# Altium PCB Servo_PCB.PcbDoc
Units mil, origin at the board's own origin, x right, y up, seen from the top; angles counter-clockwise.
Board outline 1510 x 1900 mil, 2 copper layers (Top Layer, Bottom Layer); 23 components, 15 nets, 97 pads, 47 vias.
Unrouted connection lines stored in the file: 55.
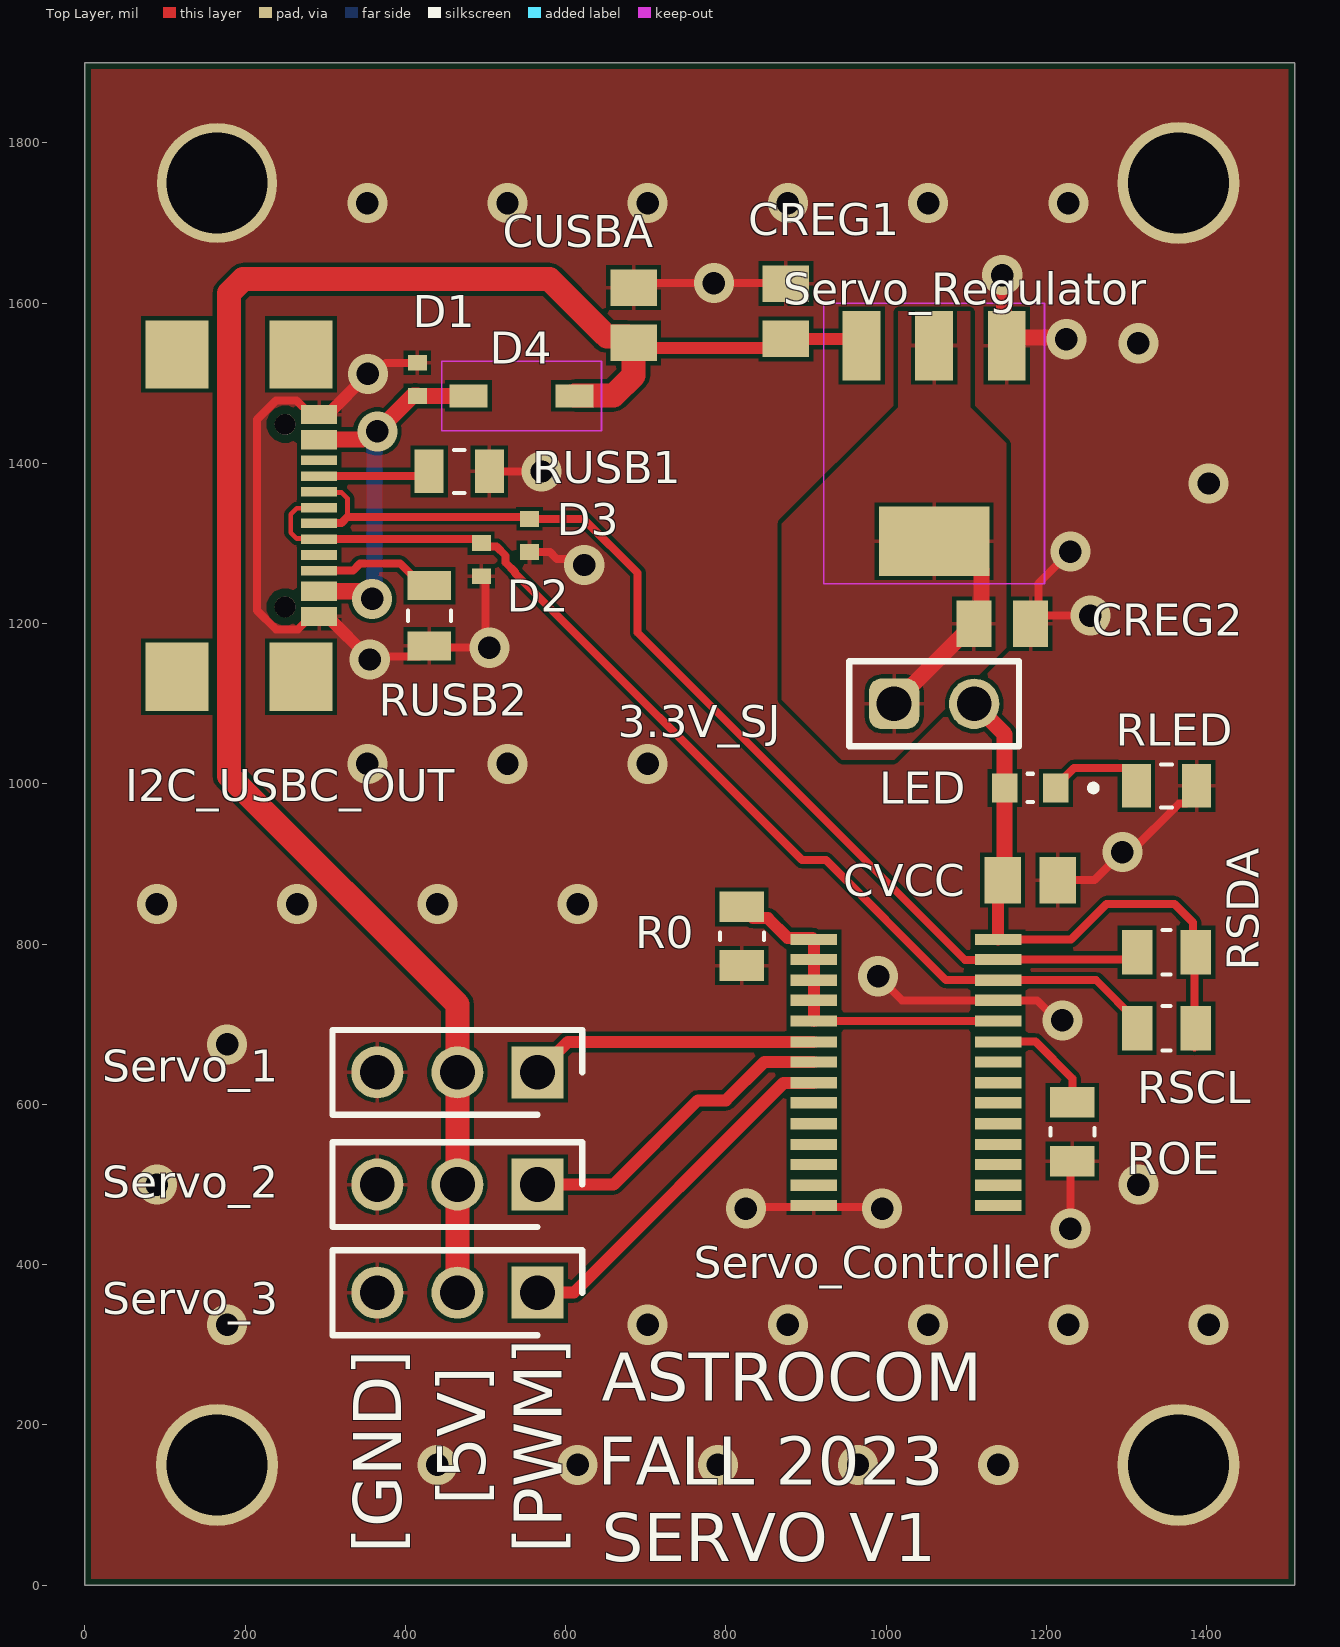
[diagram p0: Top Layer view]
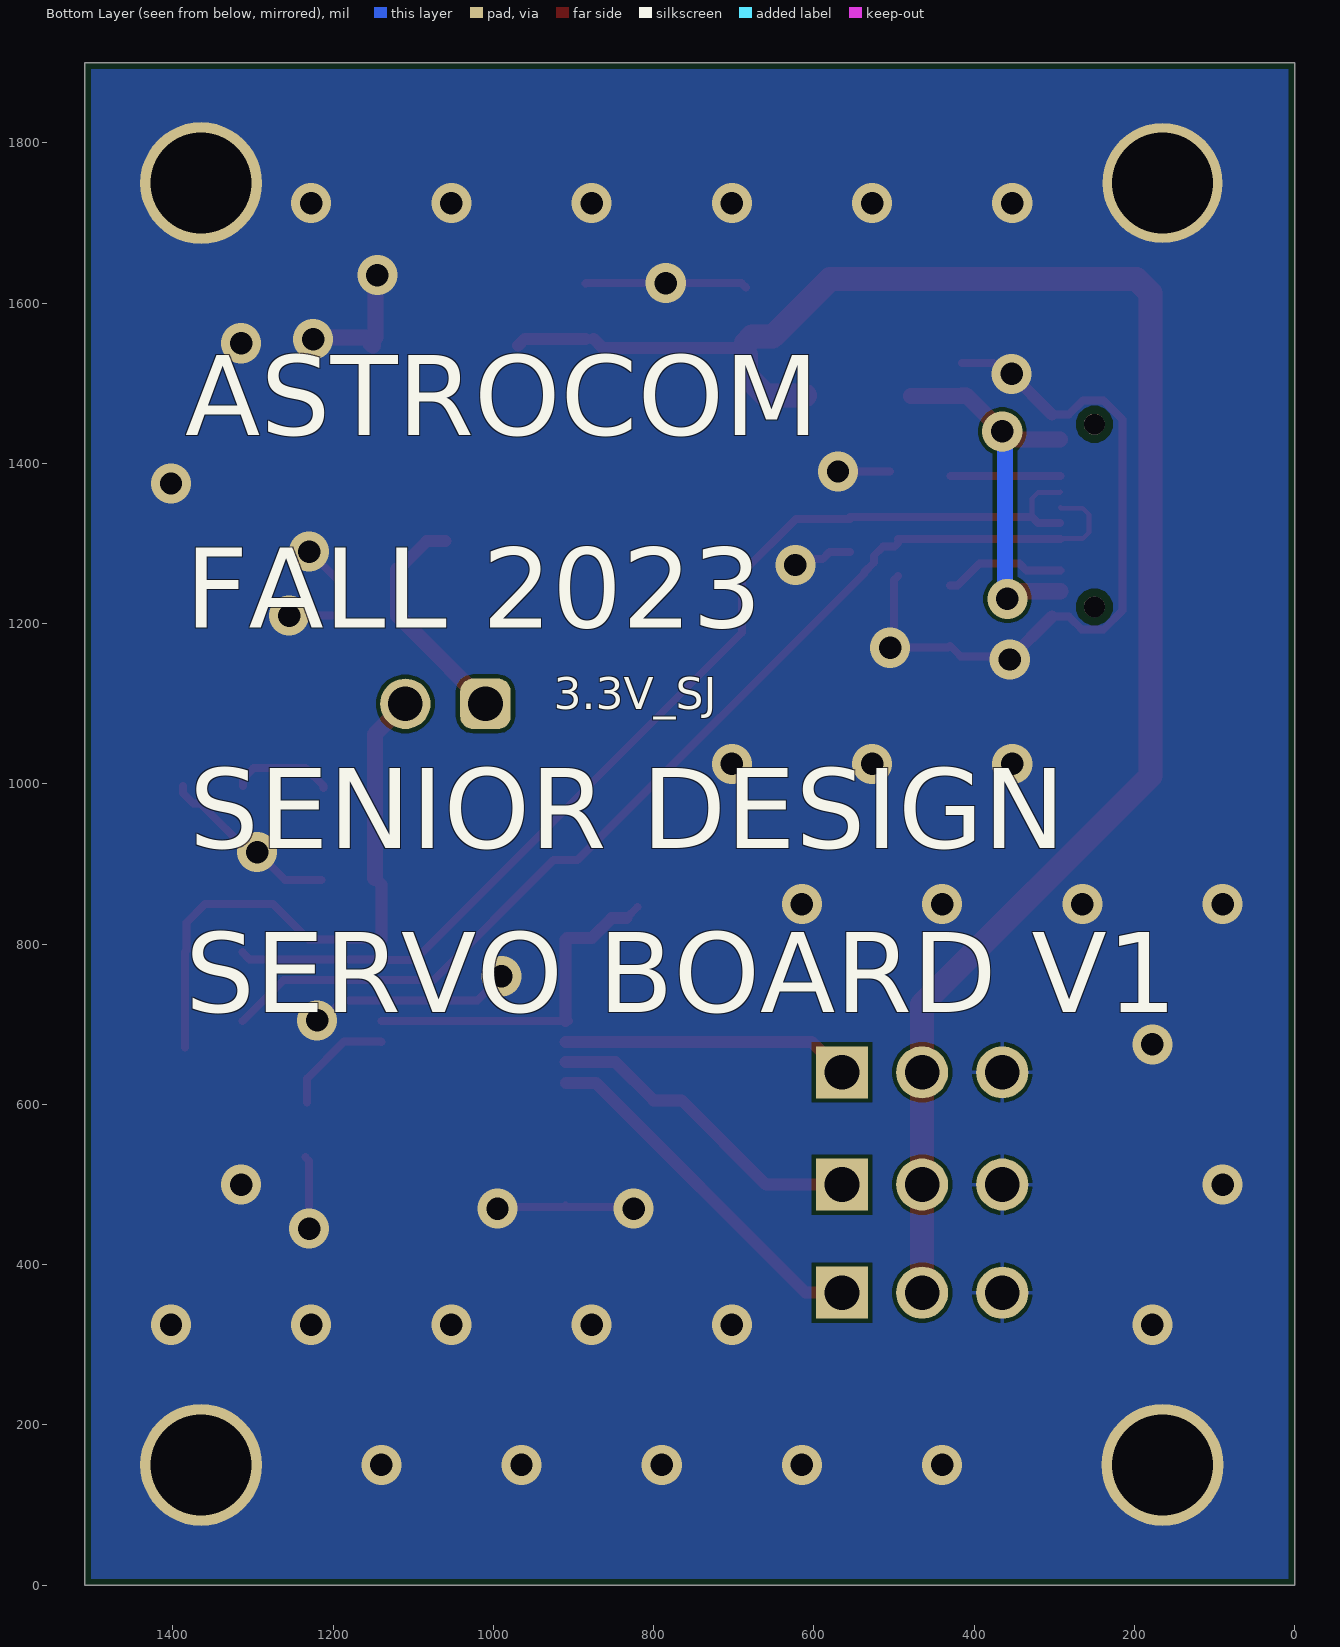
[diagram p1: Bottom Layer view, seen from below]
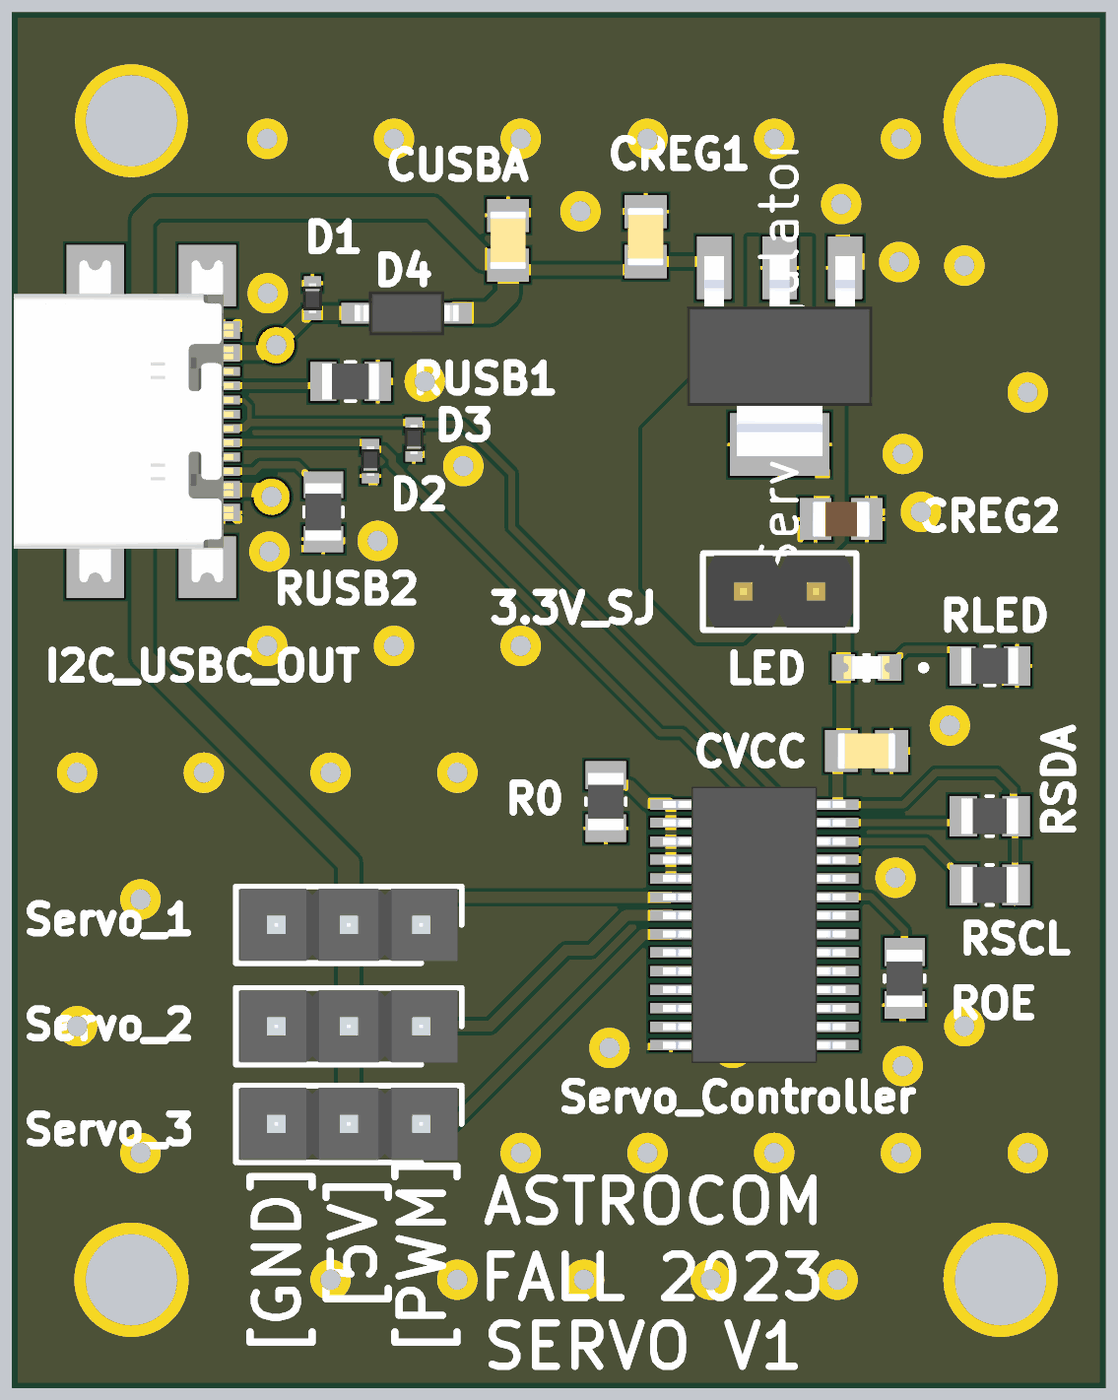
[diagram p2: 3D render of the assembled board from above, using the file's embedded part models]

## Layer stack, top to bottom
Top Solder: solder mask 0.4, Solder Resist, Dk 3.5
Top Layer: signal copper 1.4
Dielectric 1: dielectric 12.6, FR-4, Dk 4.8
Bottom Layer: signal copper 1.4
Bottom Solder: solder mask 0.4, Solder Resist, Dk 3.5

## Board outline
0,0 0,1900 1510,1900 1510,0

## Design rules (kind name [scope] priority, off if disabled: settings)
BoardOutlineClearance [All] p1: gap=7.87 ignorepadtopadclearanceinfootprint=FALSE
Clearance [All] p1: gap=5 ignorepadtopadclearanceinfootprint=FALSE except(9.84: Arc-Hole Track-Hole SMDPad-Hole THPad-Hole Via-Hole Fill-Hole Poly-Hole Region-Hole Text-Hole)
ComponentClearance [All] p1: gap=5 collisioncheckmode=3 verticalgap=5 showdistances=TRUE
DiffPairsRouting [All] p1: maxlimit=10 minlimit=5 mostfreqgap=5 toplayer_minwidth=5 toplayer_maxwidth=1000 toplayer_prefwidth=5 bottomlayer_minwidth=5 bottomlayer_maxwidth=1000 bottomlayer_prefwidth=5 maxuncoupledlength=500
Height [All] p1: minheight=0 maxheight=71497.94 prefheight=500
HoleSize [All] p1: absolutevalues=TRUE maxlimit=248.03 minlimit=11.81 maxpercent=80.000 minpercent=20.000
HoleToHoleClearance [All] p1: gap=9.84 allowstackedmicrovias=FALSE
MinimumAnnularRing [All] p1: minimumring=3
MinimumSolderMaskSliver [All] p1: minsoldermaskwidth=0
PlaneClearance [All] p1: clearance=5
PlaneConnect PlaneConnectPowerPads [InPadClass('PowerPads')] p1: planeconnectstyle=Direct reliefexpansion=20 reliefentries=4 reliefconductorwidth=10 reliefairgap=10
PlaneConnect [All] p2: pad.planeconnectstyle=Relief pad.reliefexpansion=11.81 pad.reliefentries=4 pad.reliefconductorwidth=5 pad.reliefairgap=5 via.planeconnectstyle=Direct via.reliefexpansion=11.81 via.reliefentries=4 via.reliefconductorwidth=5 via.reliefairgap=5
PolygonConnect PolygonConnectPowerPads [All vs (InPadClass('PowerPads'))] p1: connectstyle=Direct reliefconductorwidth=10 reliefentries=4 polygonreliefangle="90 Angle" airgapwidth=10
PolygonConnect [All] p2: thpad.connectstyle=Relief thpad.reliefconductorwidth=5 thpad.reliefentries=4 thpad.polygonreliefangle="90 Angle" thpad.airgapwidth=5 smdpad.connectstyle=Relief smdpad.reliefconductorwidth=5 smdpad.reliefentries=4 smdpad.polygonreliefangle="90 Angle" smdpad.airgapwidth=5 via.connectstyle=Direct via.reliefconductorwidth=5 via.reliefentries=4 via.polygonreliefangle="90 Angle" via.airgapwidth=5
RoutingVias [All] p1: holewidth=11.81 width=23.62 viastyle="Through Hole" minholewidth=11.81 minwidth=23.62 maxholewidth=23.62 maxwidth=259.84
SilkToSilkClearance [All] p1: silktosilkclearance=0
SilkToSolderMaskClearance [IsPad] p1: minsilkscreentomaskgap=5 clearancetoexposedcopper=TRUE
SolderMaskExpansion [All] p1: expansion=2.95 istentingtop=FALSE
Width [All] p1: maxlimit=1000 minlimit=5 preferedwidth=5 minimp=50.000000 maximp=50.000000 favimp=50.000000
20 further rules are at their usual default settings.

## Components (designator, comment, footprint, x,y, rotation, side; value= is the part's Value field where it differs from the comment)
3.3V_SJ "61300211121" 61300211121 1060,1100 r0 top
CREG1 "10uF" CAPC2012X88N 875,1590 r90 top
CREG2 "22uF" CAPC2012X145N 1145,1200 r180 top
CUSBA "10uF" CAPC2012X88N 685,1585 r90 top
CVCC "10uF" CAPC2012X88N 1180,880 r0 top
D1 "ESD Suppressors" MBTB-D-SOD-923F-IMP-0402 415,1505 r270 top
D2 "ESD Suppressors" MBTB-D-SOD-923F-IMP-0402 495,1280 r90 top
D3 "ESD Suppressors" MBTB-D-SOD-923F-IMP-0402 555,1310 r90 top
D4 "SCHOTTKY DIODE" SOD3715X145N 545,1484.33 r180 top
I2C_USBC_OUT "USB4110-GF-A" USB4110-GF-A_GCT 160,1335 r270 top
LED "LTST-C190GKT" LEDC1608X35N 1180,995 r180 top
R0 "10k" RESC2012X55N 820,810 r90 top
RLED "2.2k Ohms" RESC2012X60N 1350.1,997.5 r0 top
ROE "10k" RESC2012X55N 1232.5,565.89 r270 top
RSCL "10k" RESC2012X55N 1350,695 r0 top
RSDA "10k" RESC2012X55N 1350,790 r0 top
RUSB1 "5.1k Ohms" RESC2012X60N 467.4,1390 r180 top
RUSB2 "5.1k Ohms" RESC2012X60N 430,1210 r90 top
Servo_1 "61300311121" HDRV3W64P0X254_1X3_762X254X869P 565,640 r180 top
Servo_2 "61300311121" HDRV3W64P0X254_1X3_762X254X869P 565,500 r180 top
Servo_3 "61300311121" HDRV3W64P0X254_1X3_762X254X869P 565,365 r180 top
Servo_Controller "PCA9685PW,112" SOP65P640X110-28N 1025,640 r0 top
Servo_Regulator "AZ1117IH-3.3TRG1" SOT230P700X185-4N 1060,1425 r270 top

## Footprints (in the part's own frame and the unit in brackets; to place one, negate y for a bottom-side part, rotate by r counter-clockwise, add the part's x,y. Pads: shape width x height; smd on the part's side, far side on the other; paste and mask are expansions set on the pad)
61300211121 [mm] "Pin Header, pitch 2.54 mm, THT, Vertical, single row, 2p"
  rrect50% 1.6x1.6 hole 1.1: 1(-1.27,0)
  round 1.6 hole 1.1: 2(1.27,0)
  silkscreen extent -2.69,-1.35 2.69,1.35, body extent -2.54,-1.27 2.54,1.27, height 8.57
CAPC2012X88N [mm]
  rect 1.16x1.47 smd: 1(-0.875,0) 2(0.875,0)
  body extent -1.02,-0.64 1.02,0.64, height 1.4
CAPC2012X145N [mm]
  rect 1.11x1.47 smd: 1(-0.9,0) 2(0.9,0)
  body extent -1,-0.63 1,0.63, height 1.45
HDRV3W64P0X254_1X3_762X254X869P [mm]
  rect 1.65x1.65 hole 1.1: 1(0,0)
  round 1.65 hole 1.1: 2(2.54,0) 3(5.08,0)
  silkscreen extent -1.42,-1.35 6.5,1.35, body extent -1.27,-1.27 6.35,1.27, height 8.69
LEDC1608X35N [mm]
  rect 0.81x0.93 smd: A(0.81,0) C(-0.81,0)
  silkscreen extent -2.1,-0.45 0.09,0.45, body extent -0.8,-0.4 0.8,0.4, height 0.8
MBTB-D-SOD-923F-IMP-0402 [mm]
  rect 0.5x0.6 smd: 1(-0.525,0) 2(0.525,0)
  body extent -0.52,-0.33 0.52,0.33, height 0.82
RESC2012X55N [mm]
  rect 0.97x1.42 smd: 1(-0.93,0) 2(0.93,0)
  silkscreen extent -0.12,-0.7 0.12,0.7, body extent -1,-0.63 1,0.63, height 0.55
RESC2012X60N [mm]
  rect 0.92x1.38 smd: 1(-0.955,0) 2(0.955,0)
  silkscreen extent -0.17,-0.68 0.17,0.68, body extent -1,-0.63 1,0.63, height 0.6
SOD3715X145N [mm]
  rect 1.21x0.73 smd: A(1.68,0) C(-1.68,0)
  Top Layer keep-out lines w0.05: 2.535,1.1 2.535,-1.1 -2.535,-1.1 -2.535,1.1 2.535,1.1
  body extent -1.83,-0.77 1.83,0.77, height 1.51
SOP65P640X110-28N [mil]
  rect 58x14 smd: 1(-115,166) 2(-115,141) 3(-115,115) 4(-115,90) 5(-115,64) 6(-115,38) 7(-115,13) 8(-115,-13) 9(-115,-38) 10(-115,-64) 11(-115,-90) 12(-115,-115) 13(-115,-141) 14(-115,-166) 15(115,-166) 16(115,-141) 17(115,-115) 18(115,-90) 19(115,-64) 20(115,-38) 21(115,-13) 22(115,13) 23(115,38) 24(115,64) 25(115,90) 26(115,115) 27(115,141) 28(115,166)
  body extent -126,-191 126,191, height 43
SOT230P700X185-4N [mil]
  rect 86.61x47.24 smd: 1(-122.05,90.55) 2(-122.05,0) 3(-122.05,-90.55)
  rect 86.61x137.8 smd: 4(122.05,0)
  Top Layer keep-out lines w1.97: 175.2,-137.8 175.2,137.8 -175.2,137.8 -175.2,-137.8 175.2,-137.8
  body extent -138,-128 138,128, height 65
USB4110-GF-A_GCT [mil]
  round 26 hole 26: 13(-114,90) 14(114,90)
  rect 85x79 smd: 15(-201.18,109.76) 16(201.18,109.76) 17(-201.18,-44.97) 18(201.18,-44.97)
  rect 24x45 smd: A1-B12(-125.98,132.39) A4-B9(-94.49,132.39) A9-B4(94.49,132.39) A12-B1(125.98,132.39)
  rect 12x45 smd: A5(-49.21,132.39) A6(-9.84,132.39) A7(9.84,132.39) A8(49.21,132.39) B5(68.9,132.39) B6(29.53,132.39) B7(-29.53,132.39) B8(-68.9,132.39)
  body extent -222,-157 222,146, height 128

## Part data
3.3V_SJ: library part CMP-1712-00002-5, "CONN HEADER VERT 2POS 2.54MM", Color=Black, Contact Resistance=20mΩ, Current Rating=3A, Max Operating Temperature=125°C, Min Operating Temperature=-40°C, Operating Supply Voltage=250V, Connector Type="Male Pin", Contact Gender=Male, Contact Material=Copper, Contact Mating Length=5.9944mm, Contact Plating=Gold, Gender=Male, Height=8.94mm, Housing Material=PBT, Lead Free="Lead Free", Lead Pitch=2.54mm, Mount="Through Hole", NexarPartId=20081794, Number of Contacts=2, Number of Pins=2, Number of Positions=2, Number of Rows=1, Orientation=Vertical, Packaging=Bulk, Pitch=2.54mm, REACH SVHC="No SVHC", RoHS=Compliant, Termination="Through Hole", Voltage Rating=250V
CREG1: library part C0805C106J8RACAUTO, "10ÂµF Â±5% 10V Ceramic Capacitor X7R 0805 _2012 Metric_", PACKAGE="0805 KEMET", AVAILABILITY=Unavailable, MF=KEMET, MP=C0805C106J8RACAUTO, PRICE=None, SNAPEDA_LINK=https://www.snapeda.com/parts/C0805C106J8RACAUTO/KEMET/view-part/3596814/?ref=snap
CREG2: library part GRM21BR61C226ME44L, "SMD Capacitor X5R(EIA) with Capacitance: 22uF Tol. 20%. Rated Voltage: 16Vdc", PACKAGE="2012 Murata", Arrow_Electronics-Purchase-URL=https://snapeda.com/shop?store=Arrow+Electronics&id=4387753, Digi-Key_Part_Number=490-10747-1-ND, DigiKey-Purchase-URL=https://snapeda.com/shop?store=DigiKey&id=4387753, MF=Murata, Mouser-Purchase-URL=https://snapeda.com/shop?store=Mouser&id=4387753, MP=GRM21BR61C226ME44L, SNAPEDA_LINK=https://www.snapeda.com/parts/GRM21BR61C226ME44L/Murata/view-part/4387753/?ref=snap
CUSBA CVCC: library part C0805C106J8RACAUTO, "CAP CER 10UF 10V X7R 0805", PACKAGE="0805 KEMET", AVAILABILITY=Unavailable, MF=KEMET, MP=C0805C106J8RACAUTO, PRICE=None, SNAPEDA_LINK=https://www.snapeda.com/parts/C0805C106J8RACAUTO/KEMET/view-part/3596814/?ref=snap
D1 D2 D3: library part CPDQ5V0-HF, "TVS DIODE 5VWM 18.6V 0402/SOD923", PACKAGE=MBTB-D-SOD-923F-IMP-0402, AVAILABILITY="In Stock", CHECK_PRICES=https://www.snapeda.com/parts/CPDQ5V0-HF/Comchip+Technology/view-part/?ref=eda, DeviceSetName=CPDQ5V0-HF, GateName_1=G$1, LibraryName=CPDQ5V0-HF, MF="Comchip Technology", MP=CPDQ5V0-HF, PRICE=None, PURCHASE-URL="https://www.snapeda.com/api/url_track_click_mouser/?unipart_id=809934&manufacturer=Comchip Technology&part_name=CPDQ5V0-HF&search_term=cpdq5v0-hf", SNAPEDA_LINK=https://www.snapeda.com/parts/CPDQ5V0-HF/Comchip+Technology/view-part/?ref=snap, SymbolName_1=CPDQ5V0-HF
D4: library part 1N5819HW-7-F, "DIODE SCHOTTKY 40V 1A SOD123", PACKAGE=SOD3715X145N, AVAILABILITY="In Stock", CHECK_PRICES=https://www.snapeda.com/parts/1N5819HW-7-F/Diodes+Inc./view-part/?ref=eda, DeviceSetName=1N5819HW-7-F, GateName_1=G$1, LibraryName=1N5819HW-7-F, MF="Diodes Inc.", MP=1N5819HW-7-F, PRICE=None, PURCHASE-URL="https://www.snapeda.com/api/url_track_click_mouser/?unipart_id=42272&manufacturer=Diodes Inc.&part_name=1N5819HW-7-F&search_term=1n5819hw-7-f", SNAPEDA_LINK=https://www.snapeda.com/parts/1N5819HW-7-F/Diodes+Inc./view-part/?ref=snap, SymbolName_1=1N5819HW-7-F
I2C_USBC_OUT: "CONN RCP USB2.0 TYP C 24P SMD RA", MFR_NAME="Global Connector Technology", PACKAGE=USB4110-GF-A_GCT, COPYRIGHT="Copyright (C) 2023 Ultra Librarian. All rights reserved.", DeviceSetName=USB4110-GF-A, GateName_1=A, LibraryName=USB4110-GF-A, MANUFACTURER_PART_NUMBER=USB4110-GF-A, SymbolName_1=USB4110-GF-A
LED: "Green 569nm LED Indication - Discrete 2.1V 0603 (1608 Metric)", PACKAGE="0603 Lite-On", CHECK_PRICES=https://www.snapeda.com/parts/LTST-C190GKT/Lite-On+Inc./view-part/?ref=eda, MF="Lite-On Inc.", MP=LTST-C190GKT, SNAPEDA_LINK=https://www.snapeda.com/parts/LTST-C190GKT/Lite-On+Inc./view-part/?ref=snap
R0 ROE RSCL RSDA: library part TNPW080510K0FEEA, "RES 10K OHM 1% 1/8W 0805", PACKAGE=None, AVAILABILITY=Unavailable, MP=TNPW080510K0FEEA, PRICE=None
RLED: library part AC0805FR-072K2L, "Fixed Resistor, Metal Glaze/thick Film, 0.125W, 2200ohm, 150V, 1% +/-Tol, 100ppm/Cel, Surface Mount, 0805", PACKAGE=None, AVAILABILITY=Unavailable, MP=AC0805FR-072K2L, PRICE=None
RUSB1 RUSB2: library part RC0805JR-075K1L, "RC0805 5,1K 5% 0,125W", PACKAGE=None, AVAILABILITY=Unavailable, MP=RC0805JR-075K1L, PRICE=None
Servo_1: "CONN HEADER VERT 3POS 2.54MM", Manufacturer_Name="Wurth Elektronik", Mouser Part Number=710-61300311121, Datasheet Link=http://katalog.we-online.de/em/datasheet/6130xx11121.pdf, Height=8.69mm, MANUFACTURER_PART_NUMBER=61300311121, Mouser Price/Stock=https://www.mouser.co.uk/ProductDetail/Wurth-Elektronik/61300311121?qs=PhR8RmCirEYxRWFJzNKsUw%3D%3D
Servo_2 Servo_3: "Connector", Manufacturer_Name="Wurth Elektronik", Mouser Part Number=710-61300311121, Datasheet Link=http://katalog.we-online.de/em/datasheet/6130xx11121.pdf, Height=8.69mm, MANUFACTURER_PART_NUMBER=61300311121, Mouser Price/Stock=https://www.mouser.co.uk/ProductDetail/Wurth-Elektronik/61300311121?qs=PhR8RmCirEYxRWFJzNKsUw%3D%3D
Servo_Controller: "IC LED DRVR LIN PWM 25MA 28TSSOP", PACKAGE=SOP65P640X110-28N, AVAILABILITY="In Stock", CHECK_PRICES=https://www.snapeda.com/parts/PCA9685PW,112/NXP+USA+Inc./view-part/?ref=eda, DeviceSetName=PCA9685PW,112, GateName_1=A, LibraryName=PCA9685PW_112, MF="NXP USA", MP=PCA9685PW,112, PRICE=None, PURCHASE-URL=https://pricing.snapeda.com/search?q=PCA9685PW,112&ref=eda, SNAPEDA_LINK=https://www.snapeda.com/parts/PCA9685PW,112/NXP+USA+Inc./view-part/?ref=snap, SymbolName_1=PCA9685PW,112
Servo_Regulator: "IC REG LINEAR 3.3V 1A SOT223", PACKAGE=SOT230P700X185-4N, AVAILABILITY="In Stock", CHECK_PRICES=https://www.snapeda.com/parts/AZ1117IH-3.3TRG1/Diodes+Inc./view-part/?ref=eda, DeviceSetName=AZ1117IH-3.3TRG1, GateName_1=G$1, LibraryName=AZ1117IH-3.3TRG1, MF="Diodes Inc.", MP=AZ1117IH-3.3TRG1, PRICE=None, PURCHASE-URL="https://www.snapeda.com/api/url_track_click_mouser/?unipart_id=490259&manufacturer=Diodes Inc.&part_name=AZ1117IH-3.3TRG1&search_term=az1117ih-3.3trg1", SNAPEDA_LINK=https://www.snapeda.com/parts/AZ1117IH-3.3TRG1/Diodes+Inc./view-part/?ref=snap, SymbolName_1=AZ1117IH-3.3TRG1

## Free pads (board coordinates)
  round 150 hole 126: MH1(165,1750)
  round 152 hole 126: MH2(1365,1750) MH3(165,150) MH4(1365,150)

## Via types
v1: diameter 50, hole 28, Top Layer to Bottom Layer, 47 vias

## Nets (pads, with @x,y where several pads share a name; then routed paths per layer and width w, separated by ;. In a path a pad name is that pad's centre, name@x,y a point inside that pad or via, vN(x,y) a via of type N, cw(c..) or ccw(c..) an arc to the next point about the centre after c; other vN are vias at no path point)
3.3VOUTUSB: 3.3V_SJ.2 CVCC.1 LED.A RSCL.2 RSDA.2 Servo_Controller.28 | length 740.4
  Top Layer w10: Servo_Controller.28 1231,806 1275,850 1360,850 1382.91,827.09 1382.91,792.09 1385,790 RSCL.2@1385,671.31
  Top Layer w15: 3.3V_SJ.2@1110,1099.86 3.3V_SJ.2 ; Servo_Controller.28 1140,874.45 CVCC.1 CVCC.1@1148.11,882.56
  Top Layer w20: 3.3V_SJ.2@1110,1099.86 1148.11,1061.75 LED.A CVCC.1@1148.11,882.56
3.3VREGOUT: 3.3V_SJ.1 CREG2.2 Servo_Regulator.2 Servo_Regulator.4 | length 286.3
  Top Layer w15: Servo_Regulator.4 1083.33,1302.95 Servo_Regulator.4@1119.13,1267.14 ; CREG2.2@1098.56,1188.56 CREG2.2@1098.56,1189.43
  Top Layer w20: 3.3V_SJ.1@1010,1100.87 1098.56,1189.43 1119.13,1210 Servo_Regulator.4@1119.13,1267.14
5VOUTUSB: CREG1.1 CUSBA.1 D4.C Servo_1.2 Servo_2.2 Servo_3.2 Servo_Regulator.3 | length 2326.9
  Top Layer w10: CREG1.1@878.9,1555.55 CREG1.1@885,1555.55
  Top Layer w15: CUSBA.1 691.44,1544.11 863.56,1544.11 CREG1.1 ; CREG1.1@885,1555.55 960.95,1555.55 Servo_Regulator.3
  Top Layer w20: CUSBA.1@685,1535.55 CUSBA.1
  Top Layer w30: Servo_3.2 Servo_2.2 Servo_1.2 465,725 180,1010 180,1612.43 197.57,1630 580,1630 648.93,1561.07 651.61,1558.39 658.58,1558.39 677.17,1558.39 CUSBA.1 ; D4.C@611.14,1485 660,1485 685,1510 CUSBA.1@685,1535.55
GND: CREG1.2 CREG2.1 CUSBA.2 CVCC.2 D1.1 D2.1 D3.1 I2C_USBC_OUT.A1-B12 I2C_USBC_OUT.A12-B1 pad.MH1 pad.MH2 pad.MH3 pad.MH4 R0.1 RLED.2 ROE.2 RUSB1.1 RUSB2.1 Servo_1.3 Servo_2.3 Servo_3.3 Servo_Controller.14 Servo_Controller.25 Servo_Regulator.1 | length 2324.3
  Top Layer w10: I2C_USBC_OUT.A12-B1@302.89,1209.02 I2C_USBC_OUT.A12-B1 281.89,1209.02 265.87,1193 238.4,1193 215,1216.4 215,1455 238.68,1478.68 264.19,1478.68 281.89,1460.98 I2C_USBC_OUT.A1-B12 I2C_USBC_OUT.A1-B12@302.89,1460.98 ; v1@353.18,1511.27 v1(353.18,1511.82) 362.05,1511.82 375.9,1525.67 D1.1 ; v1(355.6,1155.31) 359.58,1159.29 416.89,1159.29 RUSB2.1 432.4,1170 500,1170 v1(505,1170) 500,1175 500,1254.49 495.15,1259.33 D2.1 ; RUSB1.1 v1(570,1390) ; D3.1 580.67,1289.33 589.06,1280.94 615.63,1280.94 v1(623.28,1273.28) ; CUSBA.2 690.55,1625 v1(785,1625) 884.45,1625 CREG1.2@885,1624.45 ; v1(825,470) 827,472 908,472 Servo_Controller.14 912,472 993,472 v1(995,470) ; v1(990,760) 1020,730 Servo_Controller.25 1188.43,730 1213.43,705 v1(1220,705) ; CVCC.2 1260,880 v1(1295,915) 1305.2,915 1365.53,975.33 1374.59,975.33 1387.7,988.44 RLED.2 ; v1(1230,445) 1230,529.27 ROE.2@1234.82,534.09 ; v1(1230,1290) 1190,1250 1190,1210 v1(1255,1210)
  Top Layer w15: I2C_USBC_OUT.A12-B1@302.89,1209.02 355.6,1156.31 v1(355.6,1155.31) ; I2C_USBC_OUT.A1-B12@302.89,1460.98 v1@353.18,1511.27
  Top Layer w20: v1(1145,1635) 1147.2,1632.8 1147.2,1556.97 1223.03,1556.97 v1(1225,1555) ; Servo_Regulator.1 Servo_Regulator.1@1153.83,1550.33
  other v1: 440,150 615,150 790,150 965,150 1140,150 177.5,325 702.5,325 877.5,325 1052.5,325 1227.5,325 1402.5,325 90,500 1315,500 177.5,675 90,850 265,850 440,850 615,850 352.5,1025 527.5,1025 702.5,1025 1402.5,1375 1315,1550 352.5,1725 527.5,1725 702.5,1725 877.5,1725 1052.5,1725 1227.5,1725
NetI2C_USBC_OUT_A5: I2C_USBC_OUT.A5 RUSB1.2 | length 137.4
  Top Layer w10: I2C_USBC_OUT.A5 RUSB1.2@429.8,1384.21
NetI2C_USBC_OUT_B5: I2C_USBC_OUT.B5 RUSB2.2 | length 152.6
  Top Layer w10: I2C_USBC_OUT.B5 334.58,1266.15 343.43,1275 393.54,1275 420.94,1247.6 RUSB2.2
NetLED_C: LED.C RLED.1 | length 127
  Top Layer w10: LED.C 1211.89,997.36 1234.53,1020 1290,1020 1290.33,1019.67 1299.39,1019.67 1312.5,1006.56 RLED.1
NetR0_2: R0.2 Servo_Controller.1 Servo_Controller.2 Servo_Controller.3 Servo_Controller.4 Servo_Controller.5 Servo_Controller.24 | length 442.8
  Top Layer w10: R0.2 R0.2@834.09,832.52 ; Servo_Controller.5@906,704 Servo_Controller.5 Servo_Controller.24 ; Servo_Controller.1@908,808 Servo_Controller.1
  Top Layer w15: R0.2@834.09,832.52 852.48,832.52 877,808 Servo_Controller.1@908,808 ; Servo_Controller.5 Servo_Controller.4 Servo_Controller.3 Servo_Controller.2 Servo_Controller.1
NetROE_1: ROE.1 Servo_Controller.23 | length 141.8
  Top Layer w10: Servo_Controller.23 1140.5,678.5 1186.5,678.5 1232.5,632.5 ROE.1
PWM1: Servo_1.1 Servo_Controller.6 | length 360.7
  Top Layer w15: Servo_1.1 603,678 Servo_Controller.6
PWM2: Servo_2.1 Servo_Controller.7 | length 408.4
  Top Layer w15: Servo_2.1 660,500 765,605 800,605 848,653 Servo_Controller.7
PWM3: Servo_3.1 Servo_Controller.8 | length 453.5
  Top Layer w6: Servo_Controller.8@909.76,626.76 Servo_Controller.8
  Top Layer w15: Servo_3.1 610.24,365 872,626.76 Servo_Controller.8@909.76,626.76
SRVSCLM: D2.2 I2C_USBC_OUT.A6 I2C_USBC_OUT.B6 RSCL.1 Servo_Controller.26 | length 1374.5
  Top Layer w6: I2C_USBC_OUT.B6 291.7,1306.16 264.51,1306.16 256.89,1313.78 256.89,1336.54 264.51,1344.16 291.71,1344.16 I2C_USBC_OUT.A6
  Top Layer w10: I2C_USBC_OUT.B6 D2.2@494.8,1305.47 ; D2.2 499.27,1296.4 513.6,1296.4 525.29,1284.71 525.29,1276.17 536.98,1264.49 536.98,1263.02 895,905 925,905 1075,755 Servo_Controller.26 1262.24,755 RSCL.1@1313.39,703.86
SRVSDAM: D3.2 I2C_USBC_OUT.A7 I2C_USBC_OUT.B7 RSDA.1 Servo_Controller.27 | length 1362.5
  Top Layer w6: I2C_USBC_OUT.A7 I2C_USBC_OUT.A7@293.07,1325.84 ; I2C_USBC_OUT.B7 293.08,1363.84 320.27,1363.84 327.89,1356.22 327.89,1333.46 ; Servo_Controller.27@1138.37,779.37 Servo_Controller.27
  Top Layer w10: I2C_USBC_OUT.A7@293.07,1325.84 320.27,1325.84 327.89,1333.46 D3.2@555,1333.46 ; D3.2 622.47,1330.67 690,1263.14 690,1188.74 1098.74,780 1137.74,780 Servo_Controller.27@1138.37,779.37 ; Servo_Controller.27 1304.39,781 RSDA.1
VBUS: D1.2 D4.A I2C_USBC_OUT.A4-B9 I2C_USBC_OUT.A9-B4 | length 491.4
  Top Layer w10: I2C_USBC_OUT.A4-B9 I2C_USBC_OUT.A4-B9@292.64,1429.74
  Top Layer w20: I2C_USBC_OUT.A9-B4 340.78,1240.51 350.41,1230.88 v1(358.53,1230.88) ; I2C_USBC_OUT.A4-B9@292.64,1429.74 346.63,1429.74 356.88,1440 v1(365,1440) 410,1485 D1.2@415,1485 ; D1.2 D4.A
  Bottom Layer w20: v1(358.53,1230.88) 361.76,1234.11 361.76,1436.76 v1(365,1440)
pads on no net: I2C_USBC_OUT.13 I2C_USBC_OUT.14 I2C_USBC_OUT.15 I2C_USBC_OUT.16 I2C_USBC_OUT.17 I2C_USBC_OUT.18 I2C_USBC_OUT.A8 I2C_USBC_OUT.B8 Servo_Controller.9 Servo_Controller.10 Servo_Controller.11 Servo_Controller.12 Servo_Controller.13 Servo_Controller.15 Servo_Controller.16 Servo_Controller.17 Servo_Controller.18 Servo_Controller.19 Servo_Controller.20 Servo_Controller.21 Servo_Controller.22

## Polygon pours and split planes (outlines as drawn)
GND on Top Layer "GND_L01_P003" (solid, remove dead copper, pour order 3): 1510,1900 0,1900 0,0 1510,0
3.3VREGOUT on Top Layer "3.3VREGOUT_L01_P000" (solid, remove dead copper, pour order 0): 1010,1030 1150,1170 1150,1425 1105,1470 1105,1590 1015,1590 1015,1470 870,1325 870,1105 945,1030
GND on Bottom Layer "GND_L02_P002" (solid, remove dead copper, pour order 2): 1510,1900 0,1900 0,0 1510,0

## Silkscreen, mask and mechanical layers (free items; w line width, h text height)
Top Overlay:
  text "ASTROCOM" at 645,230 h60
  text "FALL 2023" at 640,125 h60
  text "[5V]" at 499.98,99.98 h60 r90
  text "[GND]" at 395,40 h60 r90
  text "[PWM]" at 595,40 h60 r90
  text "SERVO V1" at 645,30 h60
Bottom Overlay:
  text "ASTROCOM" at 1385,1435 h100
  text "FALL 2023" at 1385,1195 h100
  text "SENIOR DESIGN" at 1380,920 h100
  text "SERVO BOARD V1" at 1385,715 h100

## Text inside footprints (layer, text, board x,y; h text height)
I2C_USBC_OUT: Mechanical 18 "Top Row Padstyle:RX24Y45D0T" at -157,1933 h40 r270; Mechanical 18 "Middle Row Padstyle: RX24Y45D0T" at -232,2009 h40 r270; Mechanical 18 "2nd Middle Row Padstyle: RX12Y45D0T" at -307,2100 h40 r270; Mechanical 18 "Bottom Row Padstyle: RX24Y45D0T" at -382,2009 h40 r270; Mechanical 18 "Second Bottom Row Padstyle: EX55Y55D32P" at -457,2190 h40 r270; Mechanical 18 "Mounting Padstyle: EX26Y26D26P" at -532,1986 h40 r270; Mechanical 18 "Second Mounting Padstyle: RX85Y79D0T" at -607,2122 h40 r270; Mechanical 18 "Independent Mtg Hole 1 Padstyle: RX85Y79D0T" at -682,2274 h40 r270; Mechanical 18 "Independent Mtg Hole 2 Padstyle: RX85Y79D0T" at -757,2274 h40 r270; Mechanical 18 "Independent Mtg Hole 3 Padstyle: EX96Y96D96P" at -832,2297 h40 r270; Mechanical 18 "Independent Mtg Hole 4 Padstyle: EX96Y96D96P" at -907,2297 h40 r270; Mechanical 18 "Alt 1 Padstyle: OX60Y90D30P" at -982,1918 h40 r270; Mechanical 18 "Alt 2 Padstyle: OX90Y60D30P" at -1057,1918 h40 r270; Mechanical 18 "0.252in/6.4mm" at 537,1471 h40 r270; Mechanical 18 "0in/0mm" at 312,1711 h40 r270; Mechanical 18 "0.228in/5.78mm" at 637,1483 h40 r270; Mechanical 18 "0.457in/11.608mm" at 737,1505 h40 r270; Mechanical 18 "0.067in/1.7mm" at 271,1956 h40 r270; Mechanical 18 "0.314in/7.976mm" at 148,2402 h40 r270; Mechanical 18 "-0.025in/-0.625mm" at 292,987 h40 r270; Mechanical 18 "-0.025in/-0.625mm" at 292,787 h40 r270; Mechanical 18 "0.201in/5.11mm" at 637,1382 h40 r270; Mechanical 18 "-0.201in/-5.11mm" at 537,1606 h40 r270; Mechanical 7 "*" at 267,1584 h40 r270; Top Designator "*" at 267,1584 h40 r270